# Altium PCB BuckDc_33.PcbDoc
Units mm, origin at the board's own origin, x right, y up, seen from the top; angles counter-clockwise.
Board outline 80 x 38 mm, 2 copper layers (Top Layer, Bottom Layer); 10 components, 6 nets, 28 pads, 2 vias.
Unrouted connection lines stored in the file: 1.
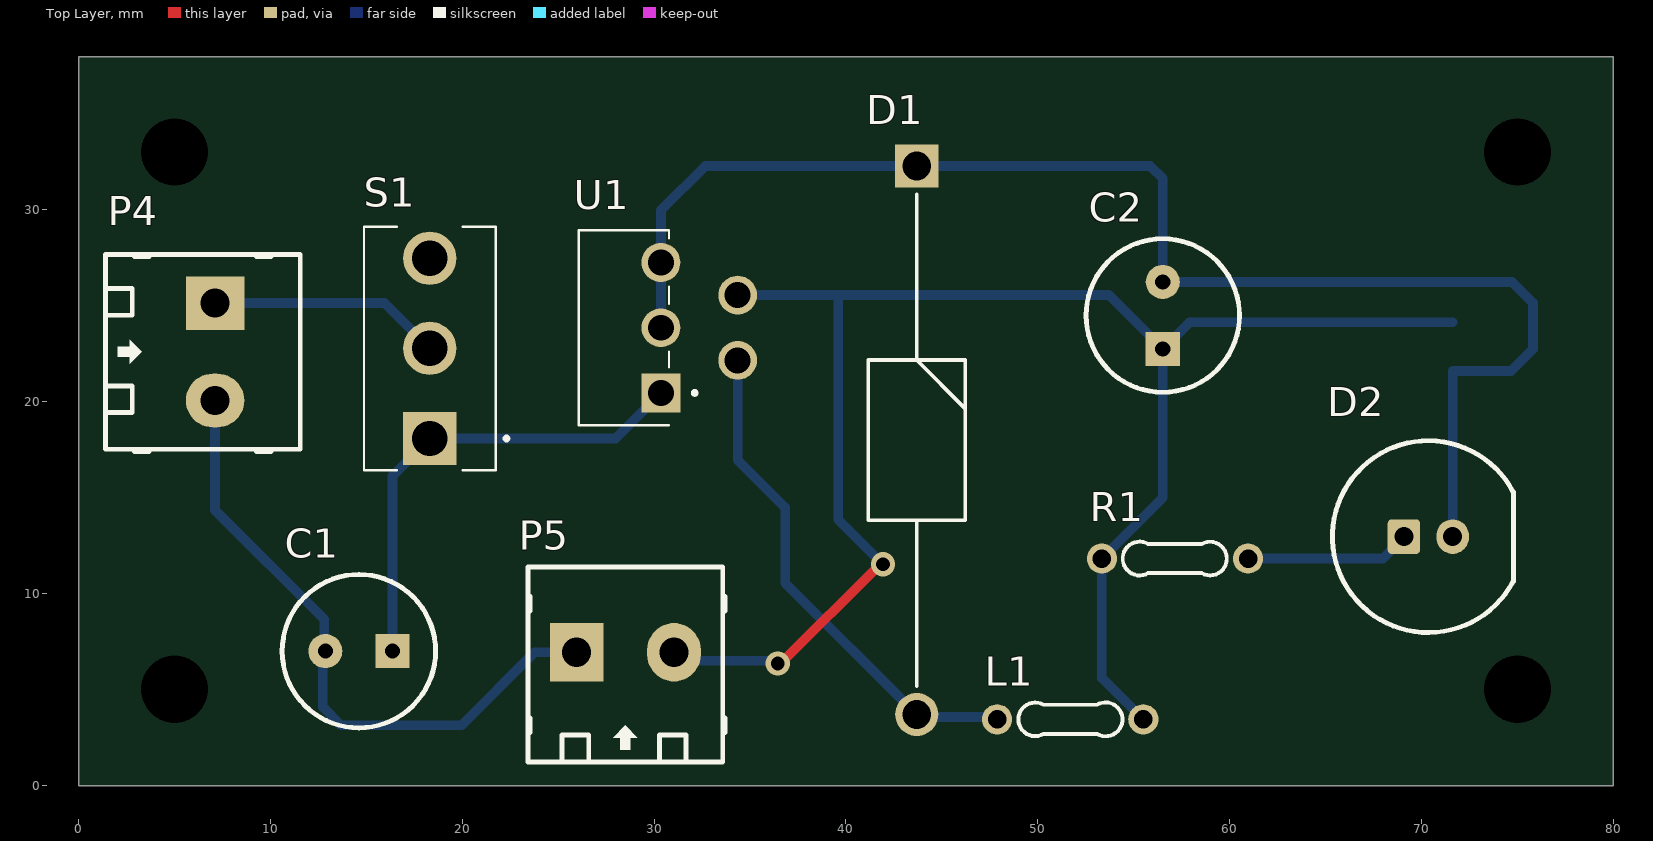
[diagram p0: Top Layer view]
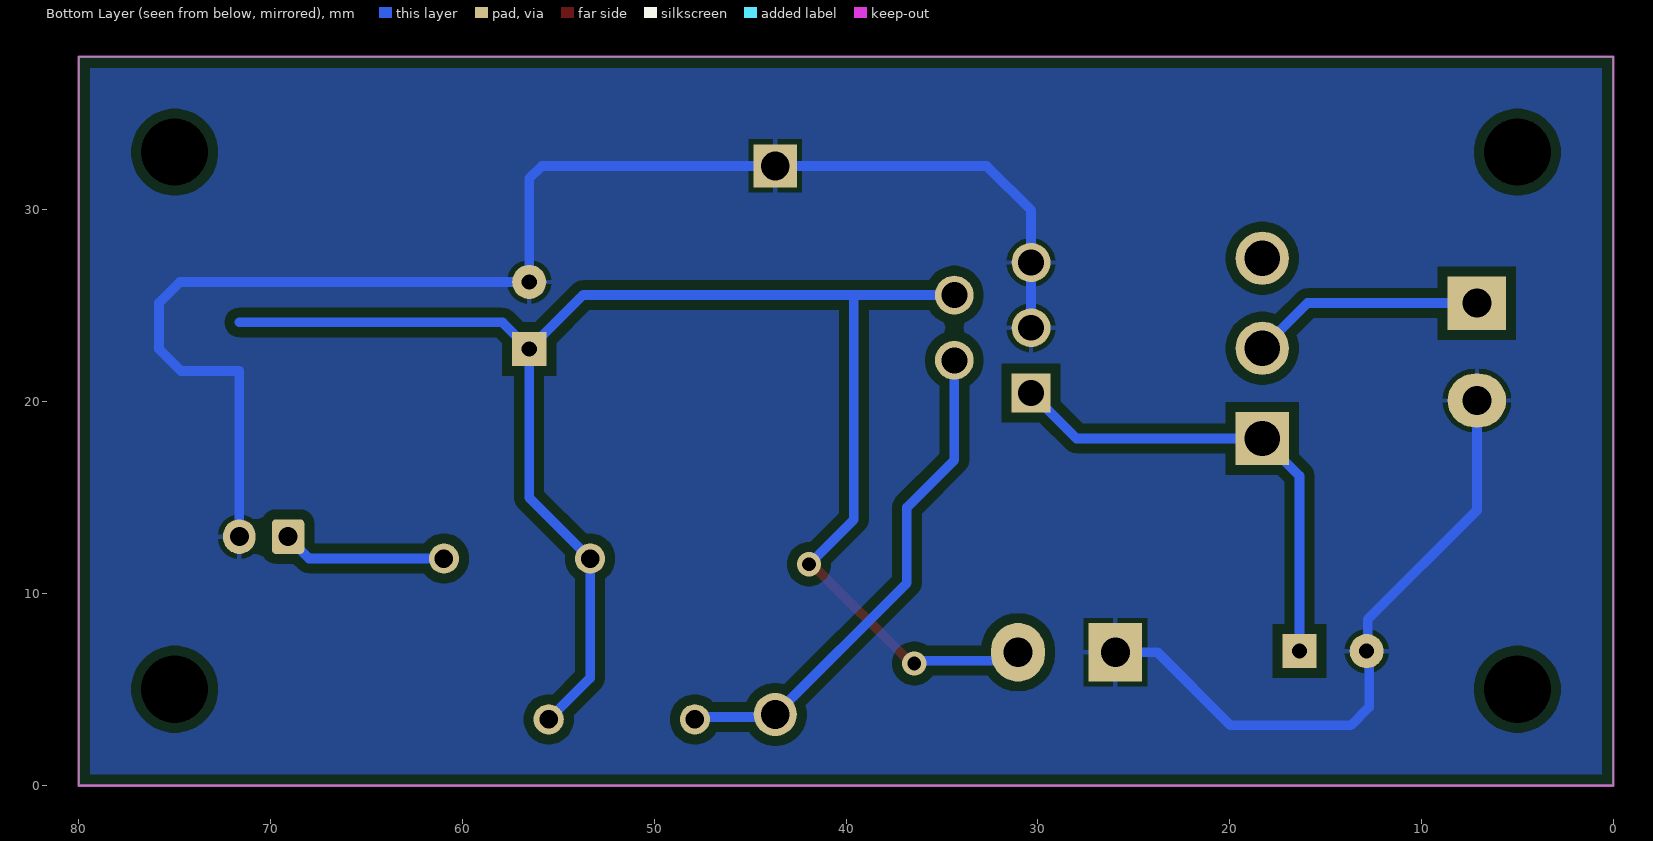
[diagram p1: Bottom Layer view, seen from below]
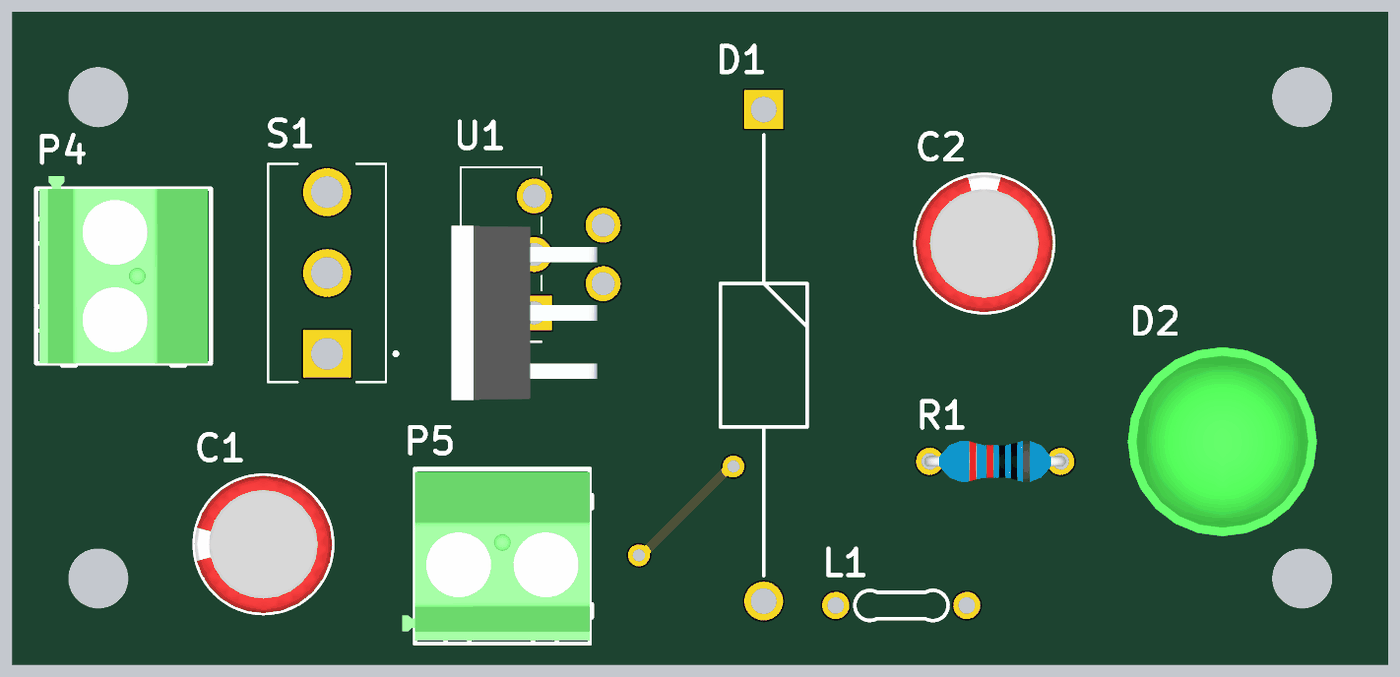
[diagram p2: 3D render of the assembled board from above, using the file's embedded part models]

## Layer stack, top to bottom
Top Solder: solder mask 0.0102, Solder Resist, Dk 3.5
Top Layer: signal copper 0.0356
Dielectric 1: dielectric 0.32, FR-4, Dk 4.8
Bottom Layer: signal copper 0.0356
Bottom Solder: solder mask 0.0102, Solder Resist, Dk 3.5

## Board outline
0,-0.027 80,-0.027 80,37.973 0,37.973

## Design rules (kind name [scope] priority, off if disabled: settings)
Clearance [All] p1: gap=0.508 ignorepadtopadclearanceinfootprint=FALSE
PolygonConnect [All] p1: connectstyle=Relief reliefconductorwidth=0.254 reliefentries=4 polygonreliefangle="90 Angle" airgapwidth=0.254
RoutingVias [All] p1: holewidth=0.711 width=1.27 viastyle="Through Hole" minholewidth=0.711 minwidth=1.27 maxholewidth=0.711 maxwidth=1.27
SolderMaskExpansion [All] p1: expansion=0.102 istentingtop=FALSE
SupplyNets "Schematic Supply Nets" [InNet('GND')] p1: voltage=0.000
Width [All] p1: maxlimit=2.54 minlimit=0.508 preferedwidth=1.016
30 further rules are at their usual default settings.

## Components (designator, comment, footprint, x,y, rotation, side; value= is the part's Value field where it differs from the comment)
C1 "680uF" CAP/D80/H125/LS35 14.605,6.985 r180 top
C2 "220nF" CAP/D80/H125/LS35 56.515,24.483 r90 top
D1 "1N5822-E3_54" DIOAD2855W132L835D505 43.688,32.283 r270 top
D2 "LED GREEN" "LED 10MM - GREEN" 70.358,12.954 r0 top
L1 "33uH" "R 1/4W" 47.879,3.429 r0 top
P4 "Header 2" HDR/Terminal/2 7.105,22.592 r270 top
P5 "Header 2" HDR/Terminal/2 28.493,6.927 r0 top
R1 "1k2" "R 1/4W/300" 60.96,11.811 r180 top
S1 "100SP1T1B4M2QE" SW_100SP1T1B4M2QE 18.3,22.771 r180 top
U1 "LM2596T-5.0" TO170P1016X470X2092-5 30.353,20.447 r90 top

## Footprints (in the part's own frame and the unit in brackets; to place one, negate y for a bottom-side part, rotate by r counter-clockwise, add the part's x,y. Pads: shape width x height; smd on the part's side, far side on the other; paste and mask are expansions set on the pad)
CAP/D80/H125/LS35 [mil] "Dia 8mm, Heigh 12.5mm, Lead Space 3.5mm (470uF/16V small)"
  rect 70x70 hole 31: 1(-68.9,0)
  round 70 hole 31: 2(68.9,0)
  silkscreen extent -157,-157 157,157, body extent -157,-157 157,157, height 454
DIOAD2855W132L835D505 [mm]
  rect 2.25x2.25 / inner round 2.25 / far side rect 2.25x2.25 hole 1.5: 1(0,0)
  round 2.25 hole 1.5: 2(28.6,0)
  silkscreen extent 1.48,-2.52 27.13,2.52
HDR/Terminal/2 [mil] "Header 2, 2 pin, hight 400mil, Pin to Pin 200mil, Colour Green"
  rect 110x120 hole 60: 1(-100,0)
  oval 110x120 hole 60: 2(100,0)
  silkscreen extent -200,-225 205,175, body extent -229,-218 200,168, height 559
"LED 10MM - GREEN" [mm]
  rrect25% 1.7x1.8 hole 1: 1(-1.27,0)
  oval 1.7x1.8 hole 1: 2(1.27,0)
  silkscreen extent -5,-5 4.44,5, body extent -5.5,-5.5 5.5,5.5, height 14.15
"R 1/4W" [mil] "Through hole resitor, axial 300mils, 1/4W"
  round 62 hole 38: 1(0,0) 2(300,0)
  silkscreen extent 44,-35 257,35
"R 1/4W/300" [mil] "Through hole resitor, axial 300mils, 1/4W"
  round 62 hole 38: 1(0,0) 2(300,0)
  silkscreen extent 44,-35 257,35, body extent -12,-47 312,47, height 97
SW_100SP1T1B4M2QE [mm]
  rect 2.775x2.775 hole 1.85: 1(0,4.7)
  round 2.775 hole 1.85: 2(0,0) 3(0,-4.7)
  silkscreen extent -4.1,-6.35 3.43,6.35
TO170P1016X470X2092-5 [mm]
  rect 2.025x2.025 / inner round 2.025 / far side rect 2.025x2.025 hole 1.35: 1(0,0)
  round 2.025 hole 1.35: 2(1.7,-4) 3(3.4,0) 4(5.1,-4) 5(6.8,0)
  silkscreen extent -1.68,-1.86 8.48,4.28, body extent -5.08,-3.66 5.08,4.81, height 20.93

## Part data
C1 C2: library part Capacitor, "Capacitor pol"
D1: "VISHAY - 1N5822-E3/54 - Schottky Rectifier, 40 V, 3 A, Single, DO-201AD, 2 Pins, 525 mV", Arrow Part Number=1N5822-E3/54, Manufacturer_Name=Vishay, Mouser Part Number=625-1N5822-E3, Arrow Price/Stock=https://www.arrow.com/en/products/1n5822-e354/vishay?utm_currency=USD&region=nac, Datasheet Link=https://4donline.ihs.com/images/VipMasterIC/IC/VISH/VISH-S-A0001809980/VISH-S-A0001809988-1.pdf?hkey=6D3A4C79FDBF58556ACFDE234799DDF0, Manufacturer_Part_Number=1N5822-E3/54, Mouser Price/Stock=https://www.mouser.co.uk/ProductDetail/Vishay-General-Semiconductor/1N5822-E3-54?qs=7w0fSgRKp92xXX1kfLSISA%3D%3D
D2: "Typical LED 3-pin 2-color"
L1: library part Inductor, "Inductor"
P4 P5: "Header, 2-Pin"
R1: library part Resistor, "Resistor"
S1: "Toggle Switch SPDT Through Hole", PACKAGE=None, Availability=Unavailable, MP=100SP1T1B4M2QE, Price=None
U1: "SIMPLE SWITCHERÂ® 4.5V to 40V, 3A Low Component Count Step-Down Regulator 5-TO-220", PACKAGE="TO-220-5 Texas Instruments", Check_prices=https://www.snapeda.com/parts/LM2596T-5.0/Texas+Instruments/view-part/?ref=eda, MF="Texas Instruments", MP=LM2596T-5.0, SnapEDA_Link=https://www.snapeda.com/parts/LM2596T-5.0/Texas+Instruments/view-part/?ref=snap

## Free pads (board coordinates)
  round 0 hole 3.5 unplated mask+0.07: 2(5,5) 2(5,33) 2(75,5) 2(75,33)

## Via types
v1: diameter 1.27, hole 0.711, Top Layer to Bottom Layer, 2 vias

## Nets (pads, with @x,y where several pads share a name; then routed paths per layer and width w, separated by ;. In a path a pad name is that pad's centre, name@x,y a point inside that pad or via, vN(x,y) a via of type N, cw(c..) or ccw(c..) an arc to the next point about the centre after c; other vN are vias at no path point)
3.3V: C2.1 L1.2 P5.2 R1.2 U1.4 | length 88.8
  Top Layer w0.508: v1(36.433,6.343) 36.597,6.343 41.766,11.512 v1(41.931,11.512)
  Bottom Layer w0.508: P5.2 31.471,6.489 36.287,6.489 v1(36.433,6.343) ; U1.4 39.592,25.547 ; v1(41.931,11.512) 39.592,13.851 39.592,25.547 ; L1.2 53.34,5.588 R1.2 56.515,14.986 C2.1 ; 71.628,24.13 57.912,24.13 C2.1 ; 39.592,25.547 53.701,25.547 C2.1
GND: C1.2 C2.2 D1.1 D2.2 P4.2 P5.1 U1.3 U1.5 | length 108
  Bottom Layer w0.508: P4.2 7.105,14.331 12.8,8.636 12.8,7.04 C1.2 12.723,6.853 12.723,4.075 13.682,3.116 19.954,3.116 23.765,6.927 P5.1 ; U1.3 U1.5 30.353,29.972 32.664,32.283 D1.1 55.855,32.283 56.515,31.623 C2.2 74.732,26.233 75.819,25.146 75.819,22.733 74.676,21.59 71.628,21.59 D2.2
NetC1_1: C1.1 S1.1 U1.1 | length 24.9
  Bottom Layer w0.508: C1.1 16.355,16.126 S1.1 27.977,18.071 U1.1
NetD1_2: D1.2 L1.1 U1.2 | length 26.6
  Bottom Layer w0.508: U1.2 34.353,16.955 36.83,14.478 36.83,10.541 D1.2 43.815,3.556 47.752,3.556 L1.1
NetD2_1: D2.1 R1.1 | length 8.6
  Bottom Layer w0.508: R1.1 67.995,11.811 69.088,12.904 D2.1
VCC: P4.1 S1.2 | length 12.2
  Bottom Layer w0.508: P4.1 15.939,25.132 S1.2
pads on no net: S1.3

## Polygon pours and split planes (outlines as drawn)
GND on Bottom Layer "GND_L02_P000" (solid, remove dead copper, pour order 0): 0,37.973 80,37.973 80,-0.027 0,-0.027

## Keep-outs
Bottom Layer:
  the board outline again, w0.15